# EAGLE board power_RevA (EAGLE 6.5.0)
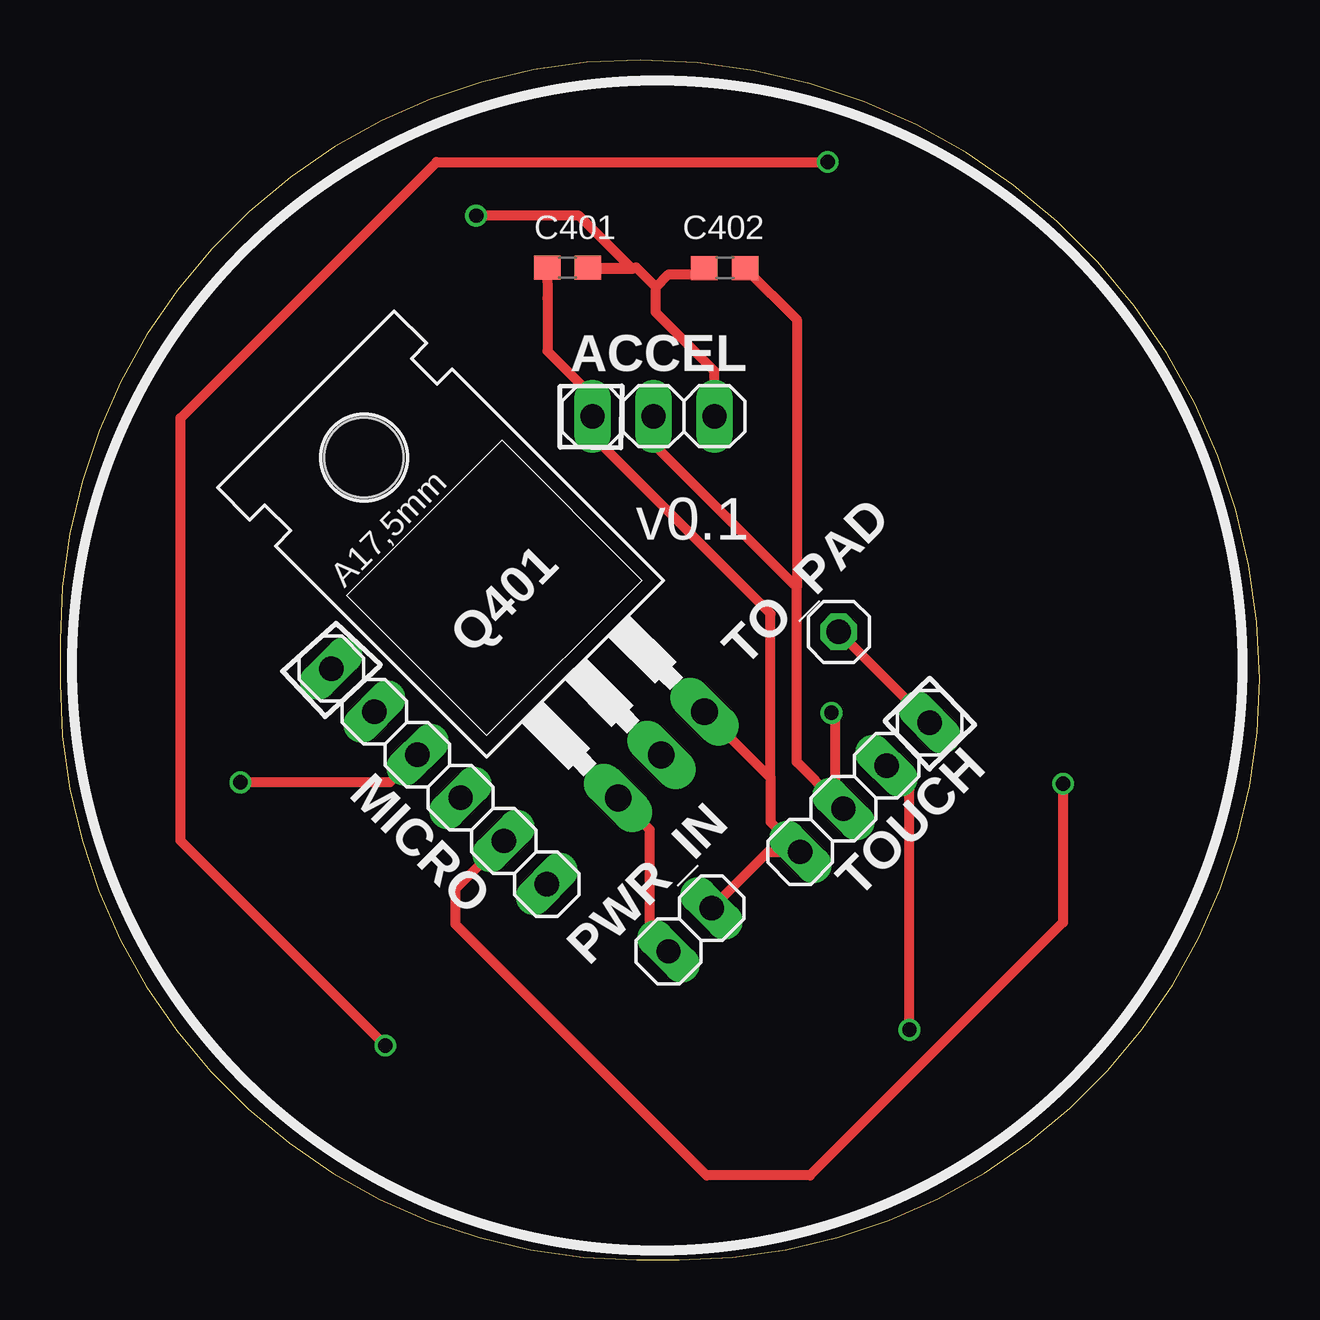
[diagram p0: board, top side]
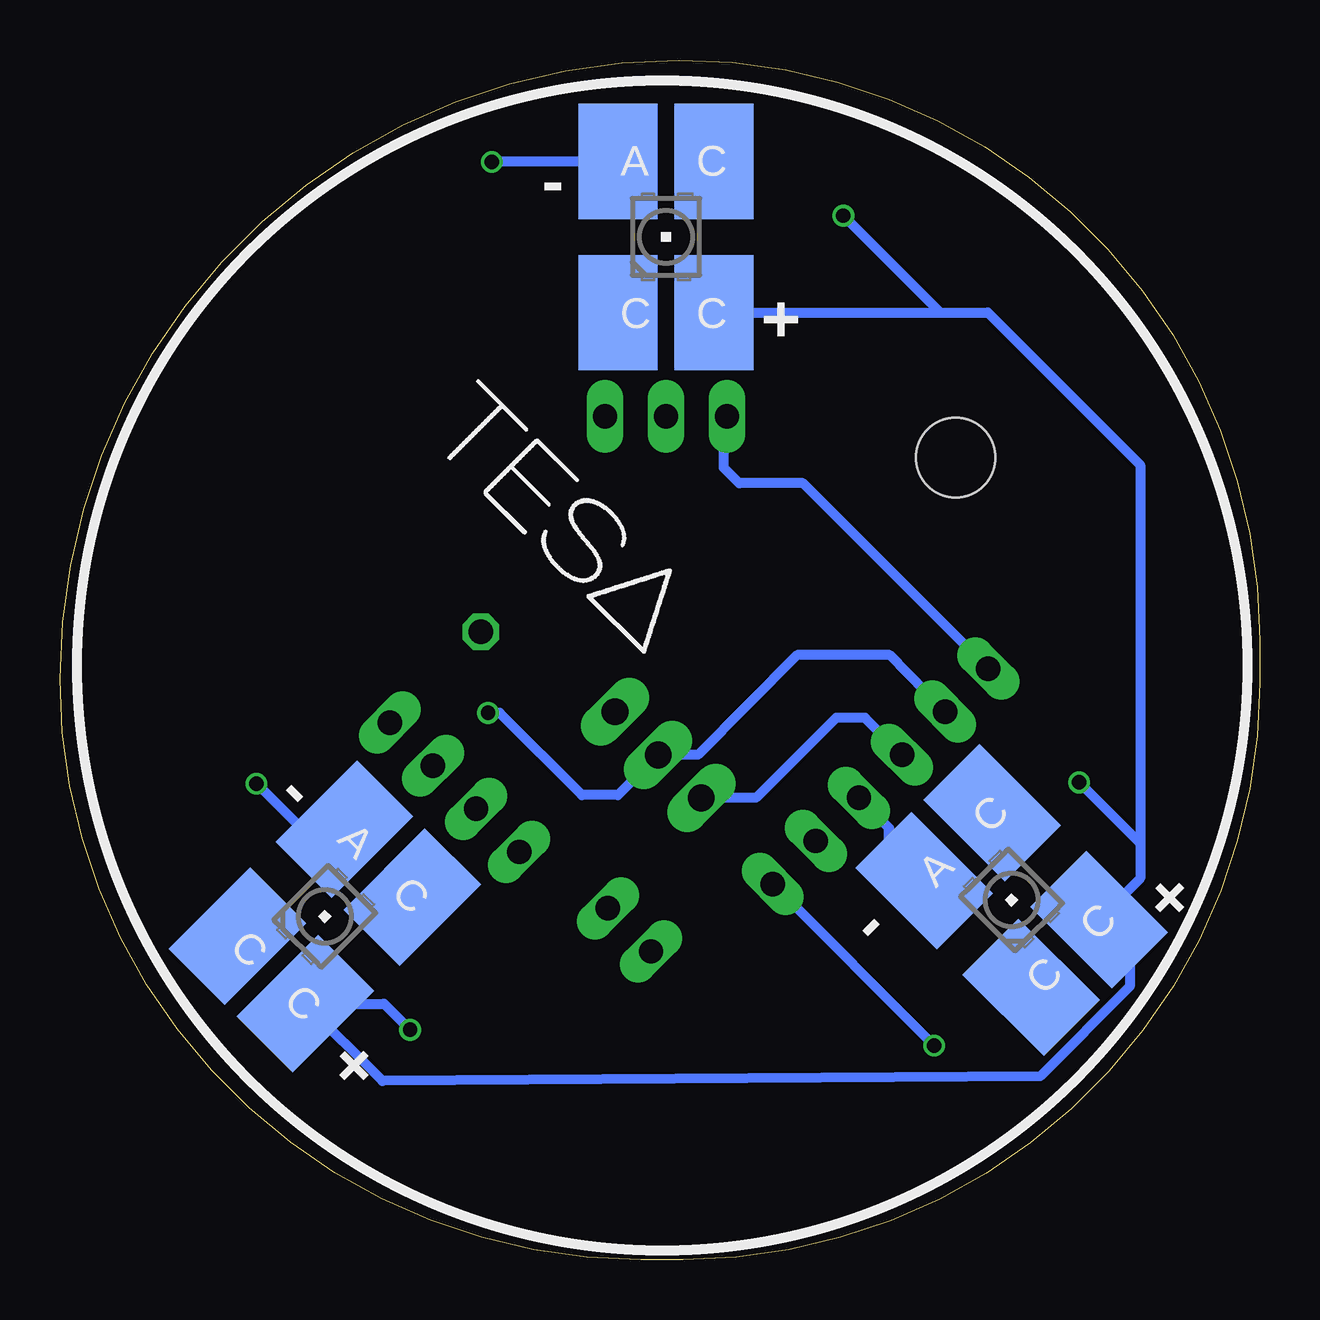
[diagram p1: board, bottom side, seen from below]

Size 50 x 50 mm. Coordinates in mm from the lower left corner, seen from the top.
Outline: 0,25.81 0,24.04 arc90 24.04,0 25.81,0 arc90 50,24.19 arc90 24.19,50 arc90 0,25.81
Copper layers (1*16): Top 0.035mm / dielectric 1.5mm / Bottom 0.035mm
Design rules "ITEADstudio_DRC": minimum track width 6mil, minimum drill 12mil, track to track 6mil, track to pad 6mil, pad to pad 6mil, via to via 6mil, smd to smd 0mil, copper to edge 10mil, drill to drill 10mil, minimum pad ring 10mil, minimum via ring 6mil, stop-mask expansion 2mil, vias tented up to drill 100mil, thermal gap 10mil

## Footprints (pad centres in the part's own frame; a part is rotated, then mirrored left to right if it is on the bottom)
1X03 = drill 1.016 long: 1 -2.54,0; 2 0,0; 3 2.54,0
C0603 = smd 1.1 x 1: 1 -0.85,0; 2 0.85,0
P-LCC-4 = smd 3.3 x 4.8: A -2,3.15; C@1 -2,-3.15; C@3 2,3.15; C@4 2,-3.15
1X06 = drill 1.016 long: 1 -6.35,0; 2 -3.81,0; 3 -1.27,0; 4 1.27,0; 5 3.81,0; 6 6.35,0
1X02 = drill 1.016 long: 1 -1.27,0; 2 1.27,0
TO220AH = drill 1.118 long: B -2.54,-6.35; C 0,-6.35; E 2.54,-6.35 | hole 3.302: 0,11.176
1X01 = drill 1.016 octagon: 1 0,0
1X04 = drill 1.016 long: 1 -3.81,0; 2 -1.27,0; 3 1.27,0; 4 3.81,0

## Placement (x,y rotation side)
ACCEL  [1X03]  24.74,35.15 0 top
C401  100n  [C0603]  21.16,41.35 180 top
C402  10u  [C0603]  27.71,41.33 0 top
LED1  [P-LCC-4]  24.74,42.62 0 bottom
LED2  [P-LCC-4]  38.96,14.3 315 bottom
LED3  [P-LCC-4]  10.34,14.99 45 bottom
MICRO  [1X06]  15.8,20.14 315 top
PWR_IN  [1X02]  26.26,13.74 225 top
Q401  TIP120  [TO220AH]  20.57,25.53 45 top
TO_PAD  [1X01]  32.46,26.16 0 top
TOUCH  [1X04]  33.55,19.68 45 top

## Library data of the parts
ACCEL MICRO PWR_IN TO_PAD TOUCH = pinhead
C401 C402 = eagle-ltspice; SPICEMODEL: NONE; SPICEPREFIX: C
LED1-LED3 = led
Q401 = transistor-power

## Nets
N$1: TO_PAD.1 TOUCH.4
N$2: ACCEL.1 C401.2 MICRO.1 PWR_IN.1 Q401.E TOUCH.1
N$4: ACCEL.2 C402.2 MICRO.2 Q401.C TOUCH.2
N$5: LED3.A MICRO.4
N$6: LED2.A MICRO.5
N$7: LED1.A MICRO.6
N$8: ACCEL.3 C401.1 C402.1 LED1.C@4 LED2.C@4 LED3.C@4 MICRO.3 PWR_IN.2 Q401.B TOUCH.3

## Tracks (layer width: path | path; a pad name or v marks a point on that pad's centre or on a via)
N$1
  Top 0.406: TOUCH.4 34.85,23.78 TO_PAD.1
N$2
  Top 0.406: 29.62,20.08 29.62,26.92 22.2,34.34 ACCEL.1 22.17,36.02 20.32,37.87 20.32,40.07 C401.2 | Q401.E 29.62,20.08 | 29.62,20.08 29.62,18.23 TOUCH.1 29.51,16.99 PWR_IN.1
  Bottom 0.406: MICRO.1 19.04,32.36 21.69,32.36 22.33,32.99 22.33,34.98 22.2,34.85 | 22.2,34.85 22.2,34.65 | 22.2,34.85 ACCEL.1
N$4  (via drill 0.6)
  Top 0.406: TOUCH.2 32.3,19.14 | 32.3,19.14 30.71,20.73 30.71,28.02 | 30.71,28.02 24.74,33.98 ACCEL.2 | v32.16,22.78 32.3,22.64 32.3,19.14 | C402.2 30.71,39.18 30.71,28.02
  Bottom 0.406: MICRO.2 15.41,25.2 19.28,25.2 23.41,21.04 Q401.C 26.75,19.36 28.25,19.36 31.67,22.78 v32.16,22.78
N$5
  Bottom 0.406: LED3.A 15.44,17.26 15.44,17.98 MICRO.4
N$6  (via drill 0.6)
  Top 0.406: v41.81,19.84 41.81,14.05 31.27,3.5 26.95,3.5 16.48,13.97 16.48,15.44 MICRO.5
  Bottom 0.406: LED2.A 39.91,17.94 v41.81,19.84
N$7  (via drill 0.6)
  Top 0.406: v13.56,8.91 5.03,17.45 5.03,35.08 15.7,45.74 v32,45.74
  Bottom 0.406: MICRO.6 v13.56,8.93 v13.56,8.91 | v32,45.74 31.98,45.77 LED1.A
N$8  (via drill 0.6)
  Top 0.406: v35.41,9.58 35.41,19.63 TOUCH.3 | PWR_IN.2 25.02,13.19 25.02,13.44 24.59,13.87 24.59,17.91 23.27,19.23 Q401.B | MICRO.3 13.75,19.89 v7.52,19.89 | ACCEL.3 27.28,37.03 24.84,39.47 24.84,40.54 | 24.84,40.54 25.38,41.07 26.61,41.07 C402.1 | 24.84,40.54 24.03,41.35 C401.1 22.06,41.3 23.85,41.3 21.64,43.51 v17.35,43.51
  Bottom 0.406: LED1.C@4 13.31,39.47 | 4.98,17.35 4.98,33.12 11.33,39.47 13.31,39.47 | v35.41,9.58 36.49,10.66 LED2.C@4 36.56,7.44 9.14,7.64 5.41,11.38 5.44,13.28 6.7,13.22 LED3.C@4 4.98,15.89 4.98,17.35 | v7.52,19.89 4.98,17.35 | MICRO.3 16.44,22.58 17.65,22.58 20.99,19.24 Q401.B | v17.35,43.51 13.31,39.47
(copper drawn outside any net)
  shapes: Bottom area x684

## Text on the board
tPlace: v0.1
bPlace: - | + | - | + | - | +